# Altium PCB frame_size.PcbDoc
Units mm, origin at the board's own origin, x right, y up, seen from the top; angles counter-clockwise.
Board outline 34 x 56 mm, 2 copper layers (Top Layer, Bottom Layer); 2 components, 7 nets, 18 pads, 0 vias.
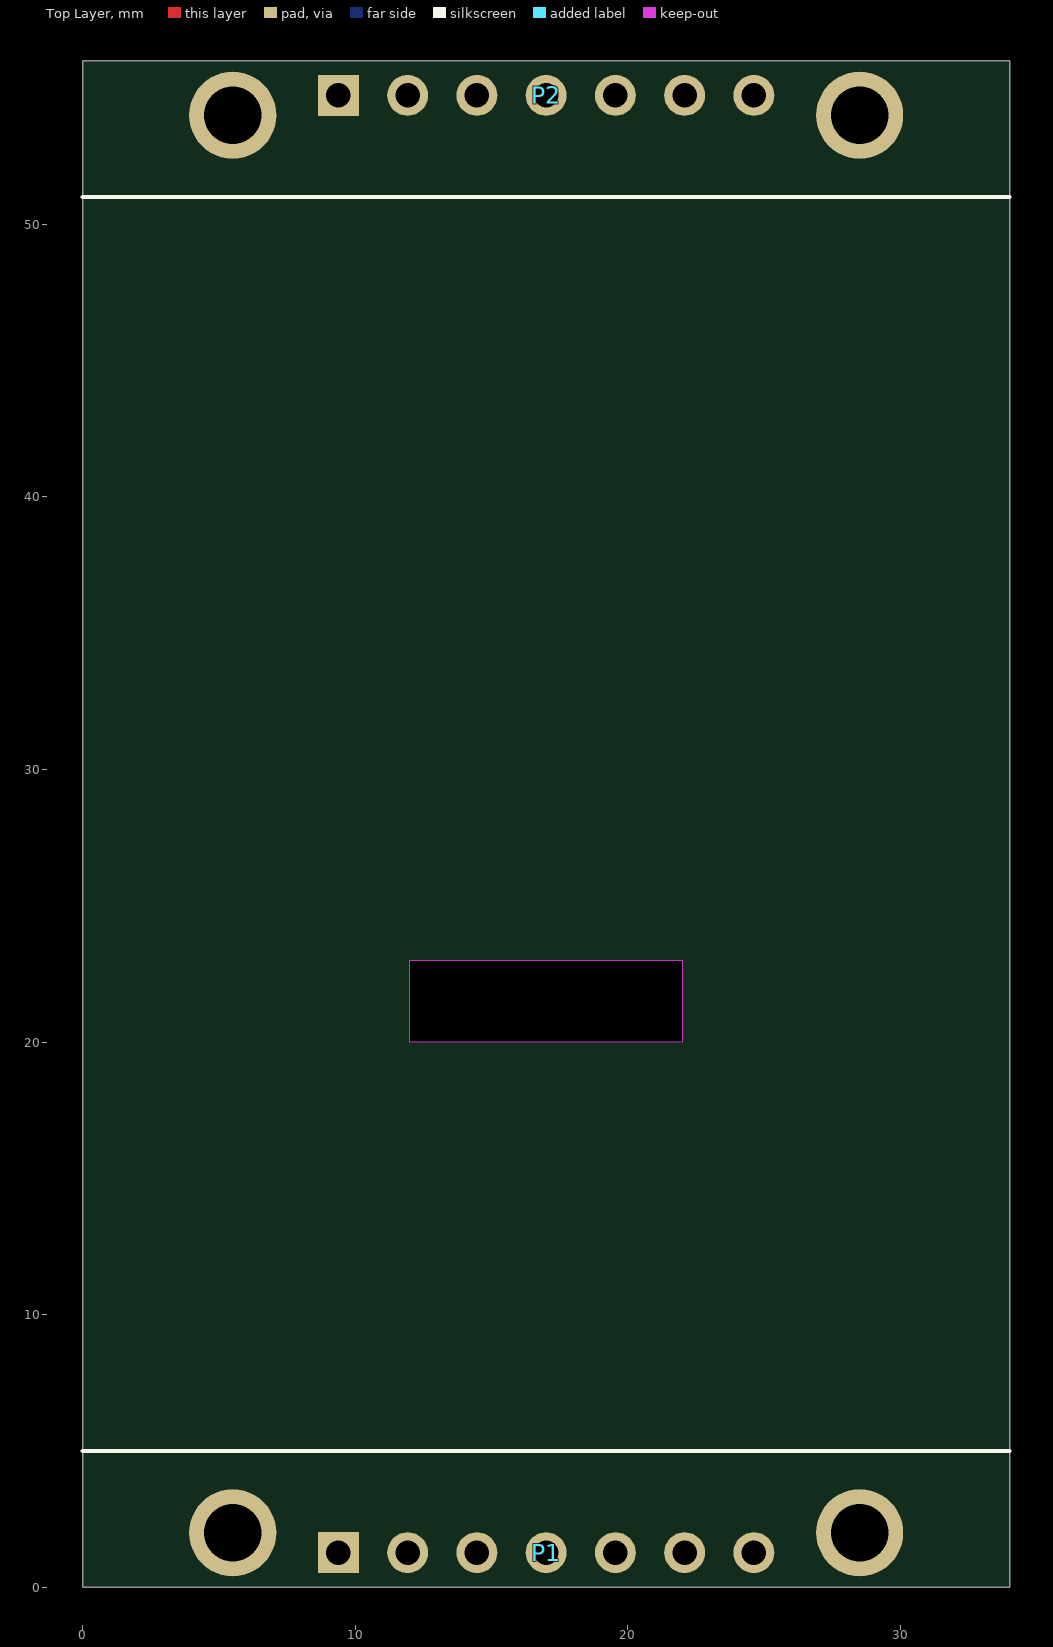
[diagram p0: Top Layer view]
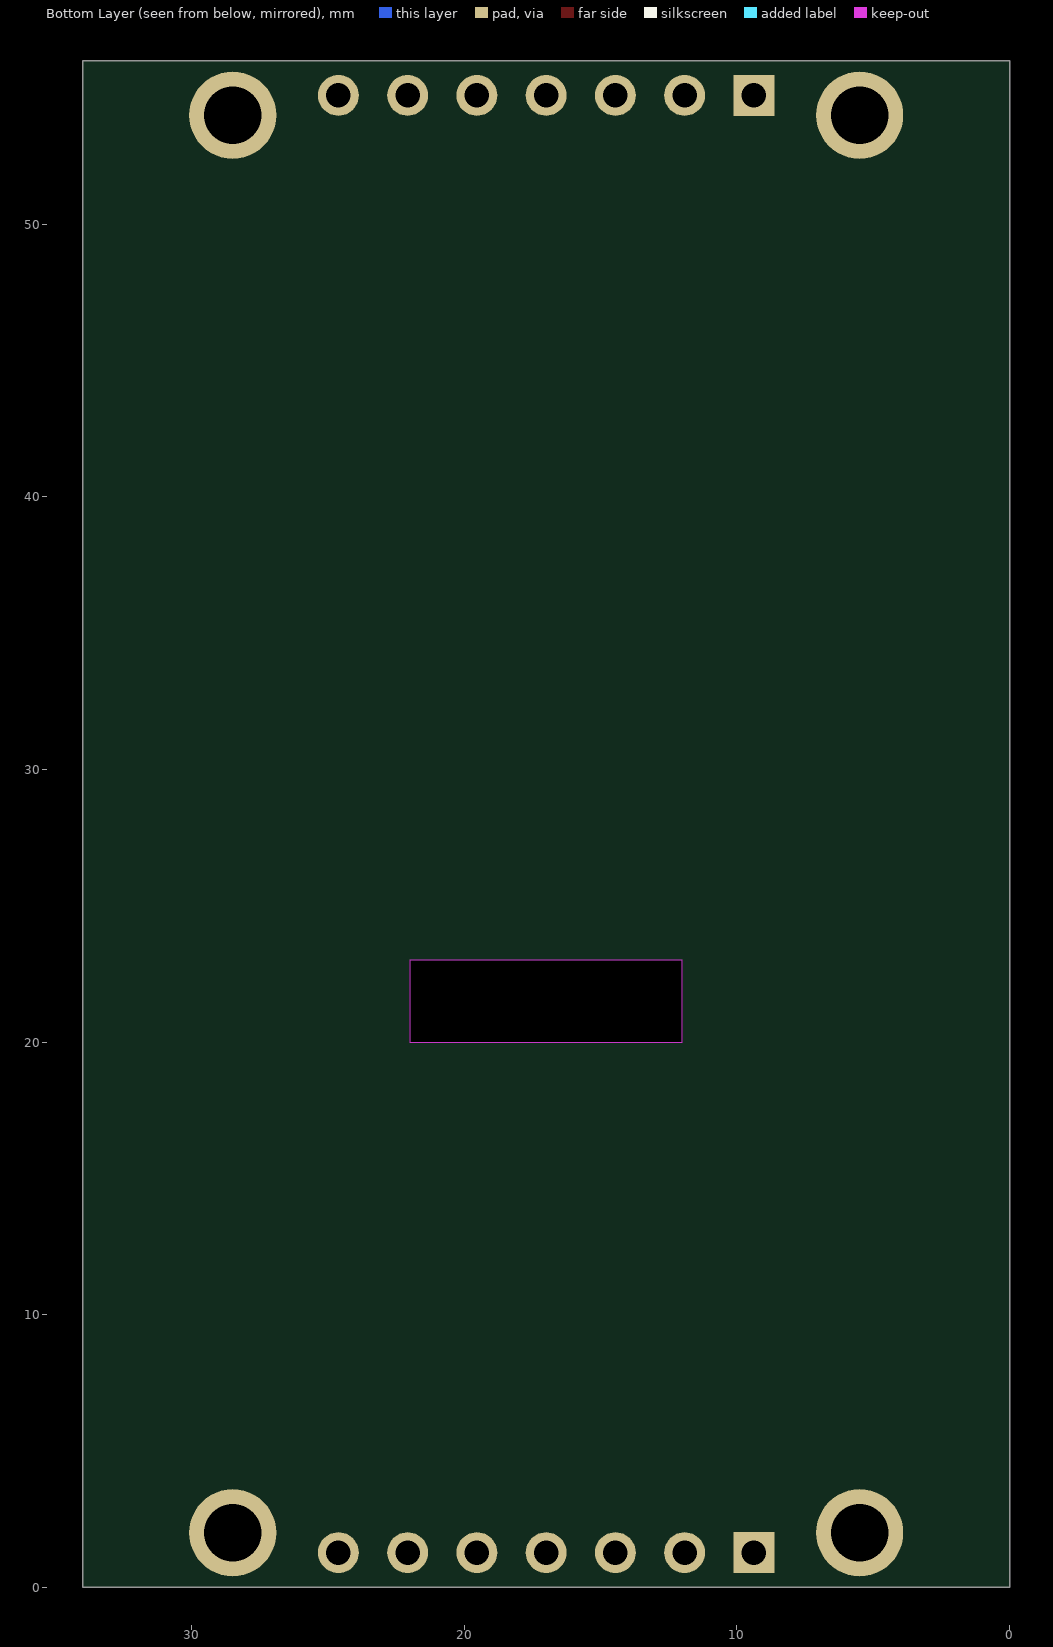
[diagram p1: Bottom Layer view, seen from below]

## Layer stack, top to bottom
Top Solder: solder mask 0.0102, Solder Resist, Dk 3.5
Top Layer: signal copper 0.0356
Dielectric 1: dielectric 0.32, FR-4, Dk 4.8
Bottom Layer: signal copper 0.0356
Bottom Solder: solder mask 0.0102, Solder Resist, Dk 3.5

## Board outline
0,0 34,0 34,56 0,56
cut-out: 12,23 22,23 22,20 12,20

## Design rules (kind name [scope] priority, off if disabled: settings)
Clearance [All] p1: gap=0.152
PolygonConnect [All] p1: connectstyle=Relief reliefconductorwidth=0.254 reliefentries=4 polygonreliefangle="90 Angle" airgapwidth=0.254
RoutingVias [All] p1: holewidth=0.3 width=0.4 viastyle="Through Hole" minholewidth=0.3 minwidth=0.4 maxholewidth=0.3 maxwidth=0.4
SolderMaskExpansion [All] p1: expansion=0.102
Width [All] p1: maxlimit=0.381 minlimit=0.254 preferedwidth=0.254
30 further rules are at their usual default settings.

## Classes and differential pairs
component class Sheet1: P2

## Components (designator, comment, footprint, x,y, rotation, side; value= is the part's Value field where it differs from the comment)
P1 "Header 7" HDR1X7 17,1.27 r0 top
P2 "Header 7" HDR1X7 17,54.73 r0 top

## Footprints (in the part's own frame and the unit in brackets; to place one, negate y for a bottom-side part, rotate by r counter-clockwise, add the part's x,y. Pads: shape width x height; smd on the part's side, far side on the other; paste and mask are expansions set on the pad)
HDR1X7 [mm] "Connector; Header; 7 Position"
  rect 1.5x1.5 hole 0.9: 1(-7.62,0)
  round 1.5 hole 0.9: 2(-5.08,0) 3(-2.54,0) 4(0,0) 5(2.54,0) 6(5.08,0) 7(7.62,0)
  body extent -8.89,-1.27 8.89,1.27, height 3.05

## Part data
P1 P2: "Header, 7-Pin"

## Free pads (board coordinates)
  round 3.2 hole 2.1 unplated: ""(5.5,2) ""(5.5,54) ""(28.5,2) ""(28.5,54)

## Nets (pads, with @x,y where several pads share a name; then routed paths per layer and width w, separated by ;. In a path a pad name is that pad's centre, name@x,y a point inside that pad or via, vN(x,y) a via of type N, cw(c..) or ccw(c..) an arc to the next point about the centre after c; other vN are vias at no path point)
GND: 
LCD_A0: 
LCD_CS: 
LCD_RST: 
LCD_SCK: 
LCD_SDA: 
VCC_3V3: 
pads on no net: P1.1 P1.2 P1.3 P1.4 P1.5 P1.6 P1.7 P2.1 P2.2 P2.3 P2.4 P2.5 P2.6 P2.7

## Silkscreen, mask and mechanical layers (free items; w line width, h text height)
Top Overlay:
  lines w0.152: 0,5 34,5 ; 0,51 34,51
Mechanical 1:
  pour cut-out: 12,20 22,20 22,23 12,23
  lines w0.152: -10,0 0,0 ; -10,1.27 9.38,1.27 9.38,12 ; -9.864,-1.016 -9.525,0 ; -9.864,2.286 -9.525,1.27 ; -9.779,0 -9.271,0 ; -9.779,1.27 -9.271,1.27 ; -9.525,-2.54 -9.525,0 ; -9.525,3.81 -9.525,1.27 ; -9.186,-1.016 -9.525,0 ; -9.186,2.286 -9.525,1.27 ; -3,56 0,56 ; -2.54,-4.953 0,-4.953 ; -2.54,11.176 0,11.176 ; -2.117,1.016 -1.778,0 ; -2.117,54.984 -1.778,56 ; -2.032,0 -1.524,0 ; -2.032,56 -1.524,56 ; -1.778,24.498 -1.778,0 ; -1.778,31.502 -1.778,56 ; -1.439,1.016 -1.778,0 ; -1.439,54.984 -1.778,56 ; -1.016,-5.292 0,-4.953 ; -1.016,-4.614 0,-4.953 ; -1.016,10.837 0,11.176 ; -1.016,11.515 0,11.176 ; 0,-7 0,0 ; 0,-5.207 0,-4.699 ; 0,-1.905 0,-1.397 ; 0,10.922 0,11.43 ; 1.016,-1.99 0,-1.651 ; 1.016,-1.312 0,-1.651 ; 5.5,-7 5.5,2 ; 5.5,-5.207 5.5,-4.699 ; 5.5,54 5.5,60 ; 5.5,57.912 5.5,58.42 ; 6.516,-5.292 5.5,-4.953 ; 6.516,-4.614 5.5,-4.953 ; 6.516,57.827 5.5,58.166 ; 6.516,58.505 5.5,58.166 ; 8.04,-4.953 5.5,-4.953 ; 9.38,10.922 9.38,11.43 ; 10.396,10.837 9.38,11.176 ; 10.396,11.515 9.38,11.176 ; 11.92,11.176 9.38,11.176 ; 13.471,-1.651 0,-1.651 ; 13.471,58.166 5.5,58.166 ; 20.529,-1.651 34,-1.651 ; 20.529,58.166 28.5,58.166 ; 27.484,57.827 28.5,58.166 ; 27.484,58.505 28.5,58.166 ; 28.5,2 40,2 ; 28.5,57.912 28.5,58.42 ; 28.5,60 28.5,54 40,54 ; 29.845,54.991 37.465,62.611 41.91,62.611 ; 32.984,-1.99 34,-1.651 ; 32.984,-1.312 34,-1.651 ; 34,-3 34,0 ; 34,-1.905 34,-1.397 ; 37.253,3.016 37.592,2 ; 37.253,52.984 37.592,54 ; 37.338,2 37.846,2 ; 37.338,54 37.846,54 ; 37.592,24.471 37.592,2 ; 37.592,31.529 37.592,54 ; 37.931,3.016 37.592,2 ; 37.931,52.984 37.592,54 ; 39.412,-1.016 39.751,0 ; 39.412,3.016 39.751,2 ; 39.497,0 40.005,0 ; 39.497,2 40.005,2 ; 39.751,-2.54 39.751,0 ; 39.751,4.54 39.751,2 ; 40,0 34,0 ; 40.09,-1.016 39.751,0 ; 40.09,3.016 39.751,2 ; 0,0 0,56 ; 0,0 34,0 ; 0,56 34,56 34,0 ; 12,20 22,20 22,23 12,23 12,20
  text "Φ2 x 4" at 42.418,62.23 h1.52
  text "23 (mm)" at 13.725,57.24 h1.02
  text "56 (mm)" at -0.852,24.752 h1.02 r90
  text "52 (mm)" at 38.518,24.725 h1.02 r90
  text "9.38 (mm)" at 0.803,7.471 h1.02
  text "2 (mm)" at 43.456,-1.822 h1.02 r90
  text "34 (mm)" at 13.725,-2.577 h1.02
  text "1.27 (mm)" at -5.82,-3.172 h1.02 r90
  text "5.5 (mm)" at -0.684,-8.658 h1.02